# Altium PCB OverCurrent Protection circuit.PcbDoc
Units mm, origin at the board's own origin, x right, y up, seen from the top; angles counter-clockwise.
Board outline 44.45 x 54.48 mm, 2 copper layers (Top Layer, Bottom Layer); 19 components, 15 nets, 61 pads, 12 vias.
Unrouted connection lines stored in the file: 5.
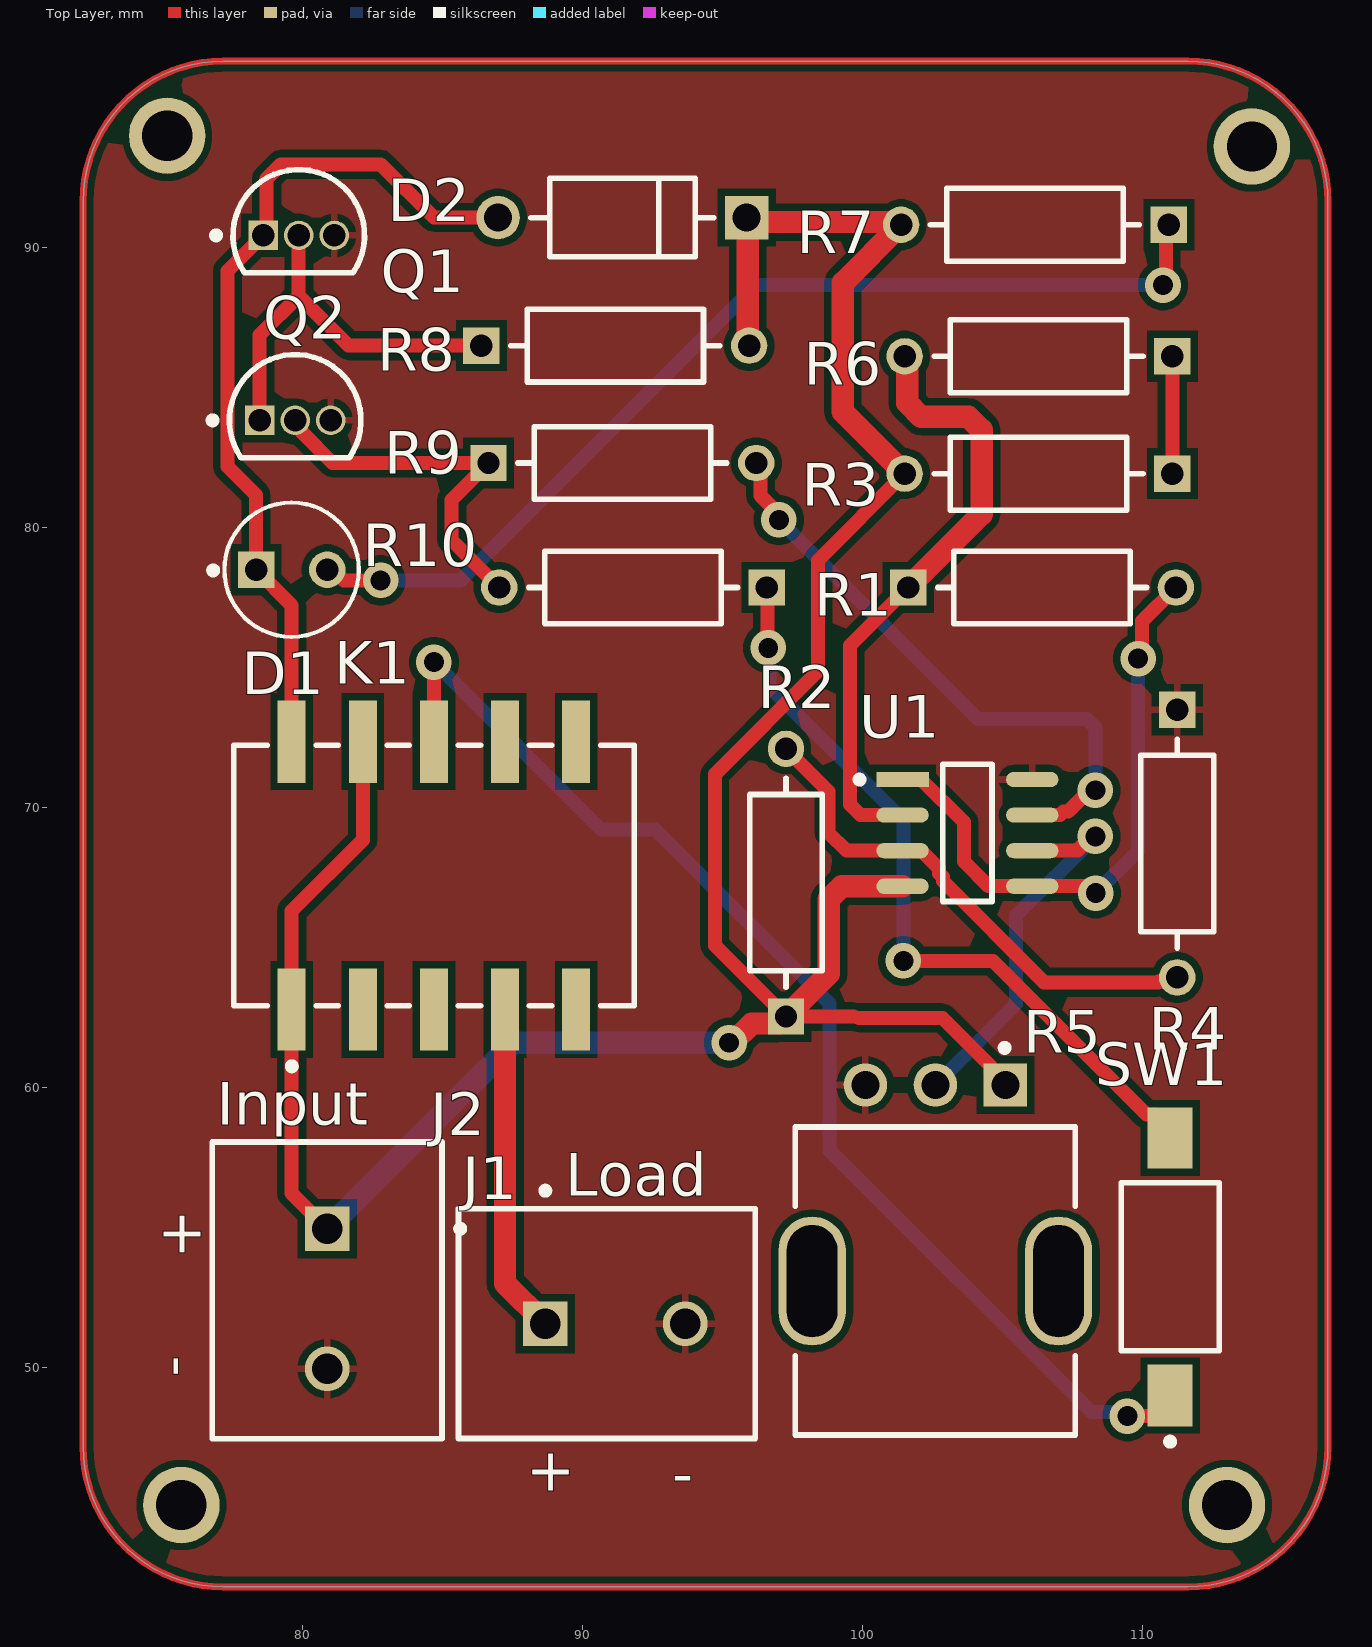
[diagram p0: Top Layer view]
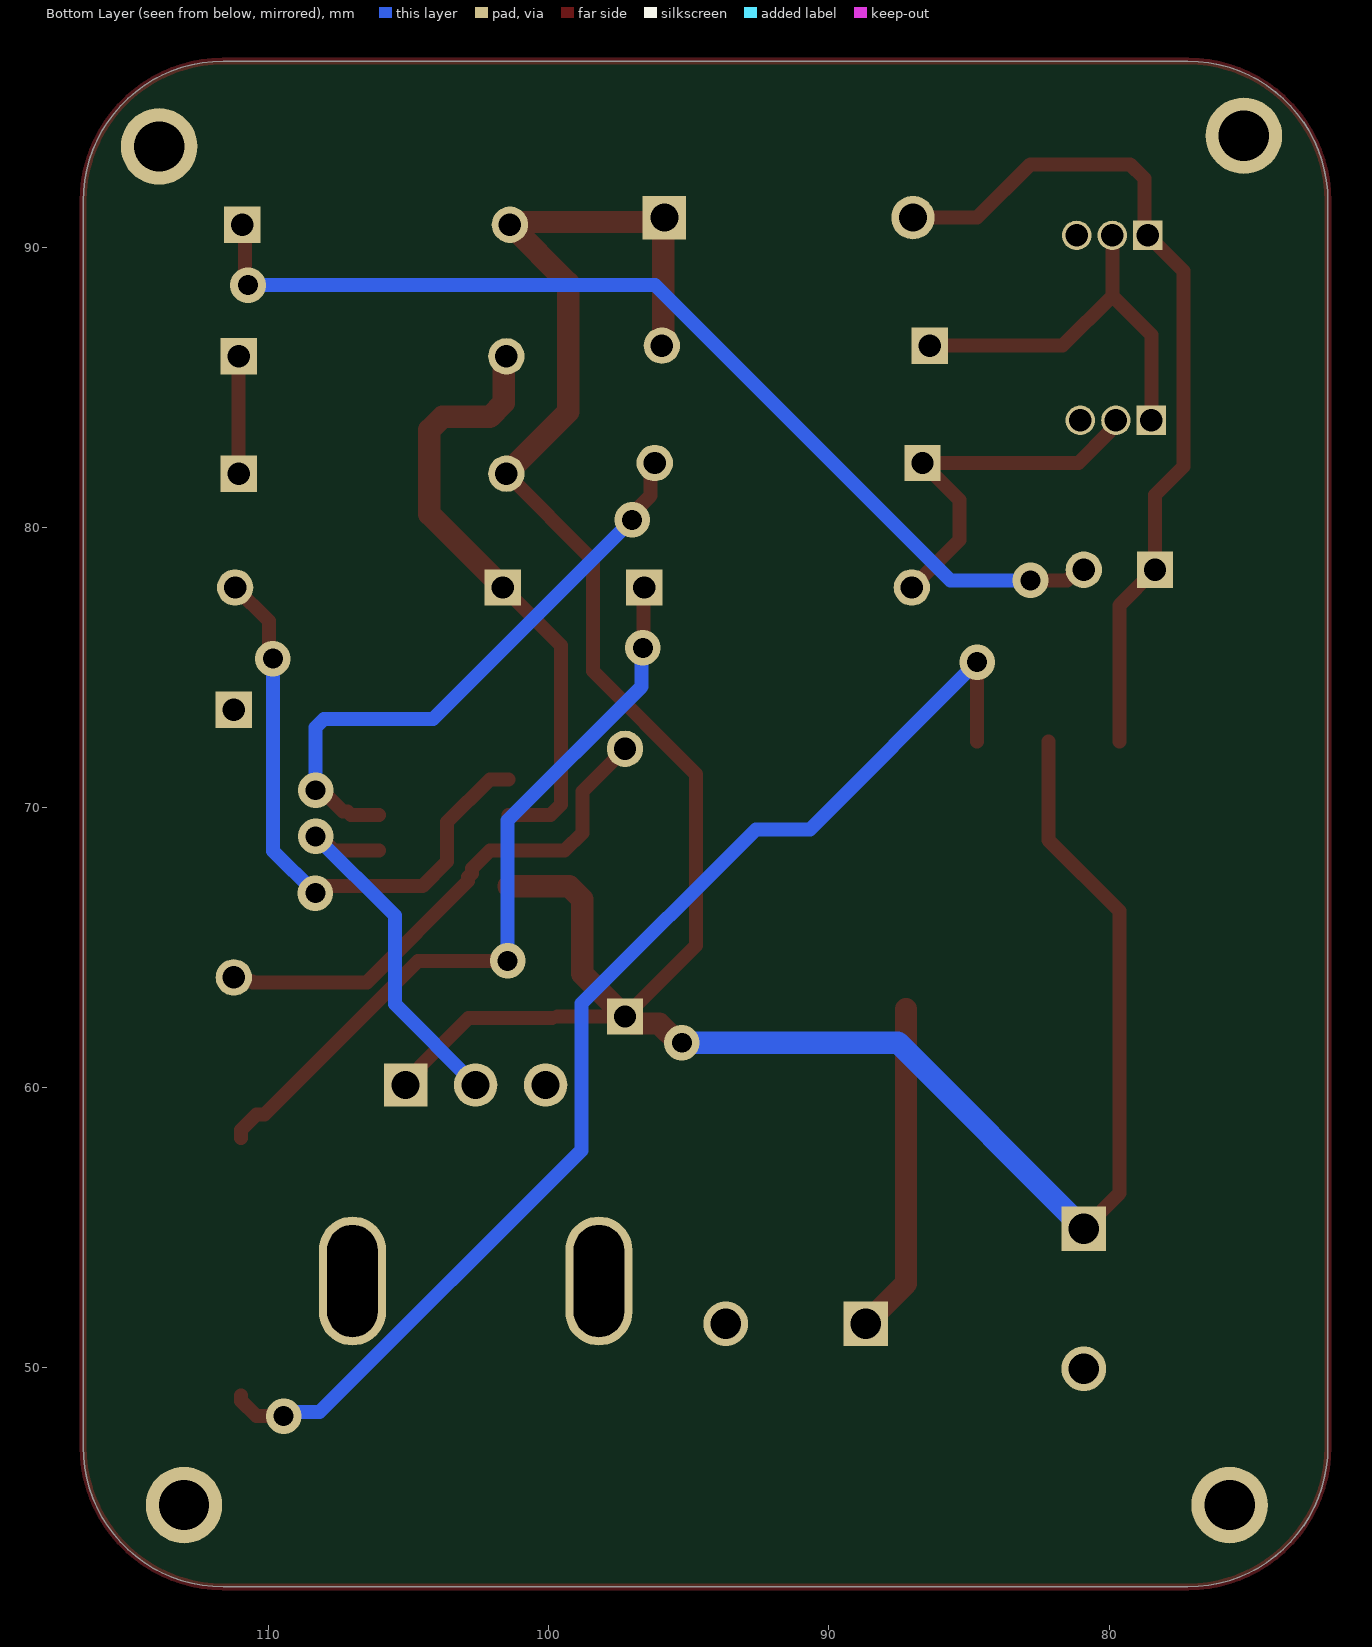
[diagram p1: Bottom Layer view, seen from below]
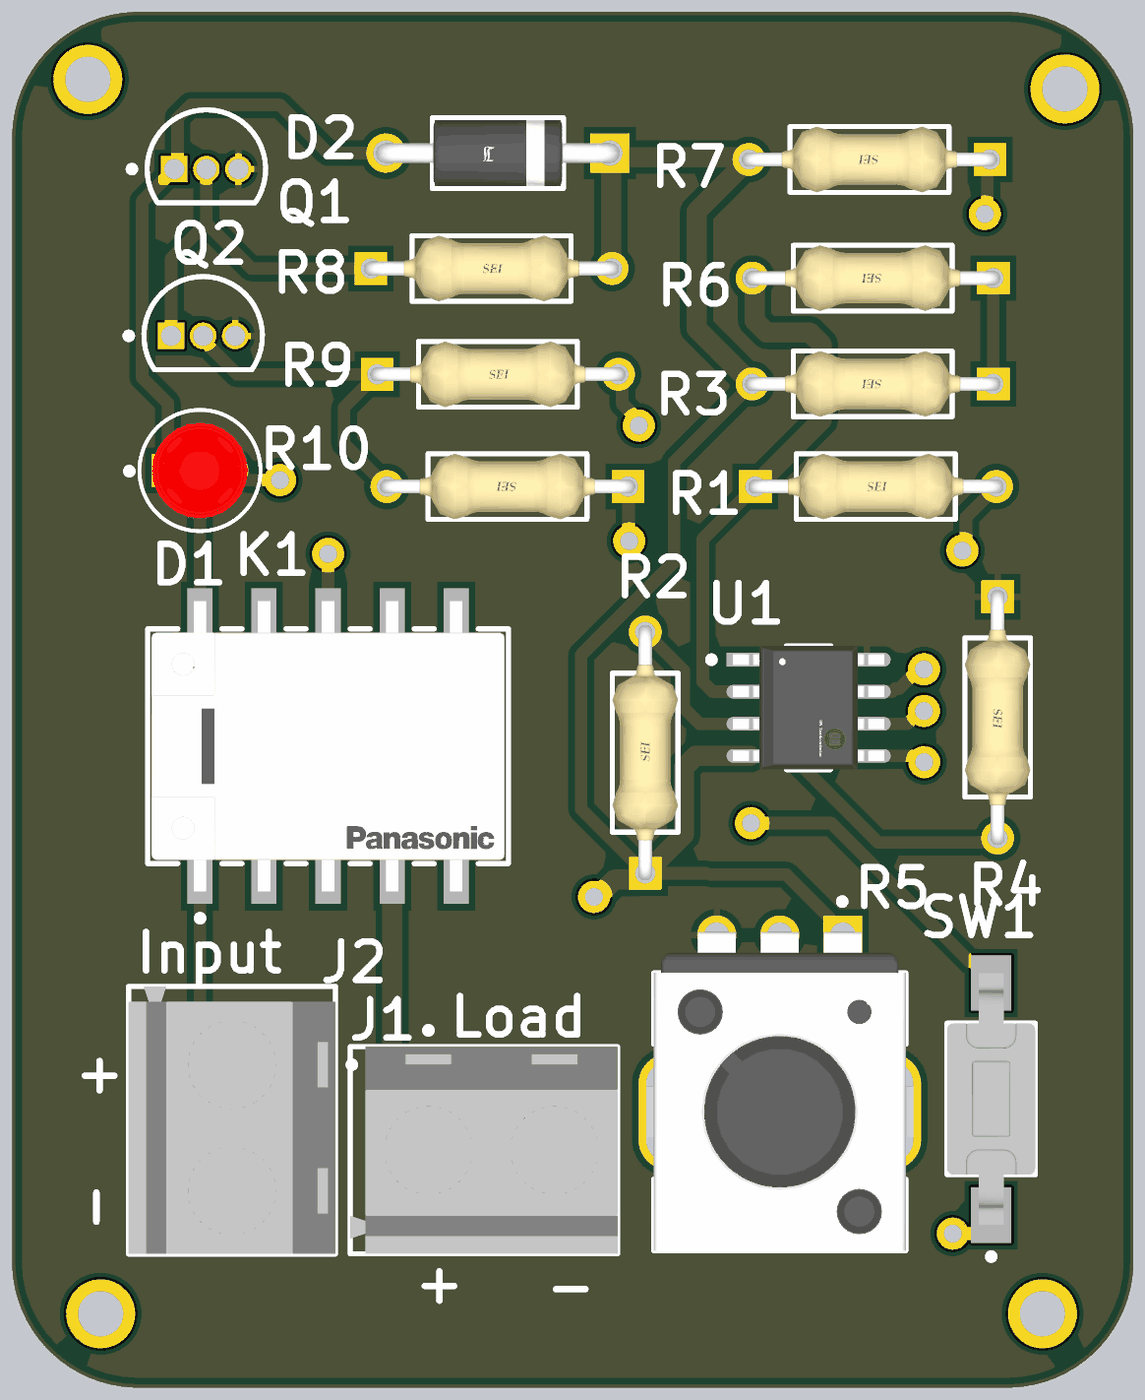
[diagram p2: 3D render of the assembled board from above, using the file's embedded part models]

## Layer stack, top to bottom
Top Solder: solder mask 0.0102, Solder Resist, Dk 3.5
Top Layer: signal copper 0.0356
Dielectric 1: dielectric 0.32, FR-4, Dk 4.8
Bottom Layer: signal copper 0.0356
Bottom Solder: solder mask 0.0102, Solder Resist, Dk 3.5

## Board outline
72.183,47.164 72.183,91.647 cw(c77.183,91.647) 77.183,96.647 111.633,96.647 cw(c111.633,91.647) 116.633,91.647 116.633,47.164 cw(c111.633,47.164) 111.633,42.164 77.183,42.164 cw(c77.183,47.164)

## Design rules (kind name [scope] priority, off if disabled: settings)
Clearance [All] p1: gap=0.254 ignorepadtopadclearanceinfootprint=FALSE
PolygonConnect [All] p1: connectstyle=Relief reliefconductorwidth=0.254 reliefentries=4 polygonreliefangle="90 Angle" airgapwidth=0.254
RoutingVias [All] p1: holewidth=0.711 width=1.27 viastyle="Through Hole" minholewidth=0.711 minwidth=1.27 maxholewidth=0.711 maxwidth=1.27
SolderMaskExpansion [All] p1: expansion=0.102 istentingtop=FALSE
SupplyNets "Schematic Supply Nets_1" [InNet('VCC')] p1: voltage=0.000
SupplyNets "Schematic Supply Nets" [InNet('GND')] p2: voltage=0.000
Width [All] p1: maxlimit=1 minlimit=0.5 preferedwidth=0.8 minimp=50.000000 maximp=50.000000 favimp=50.000000
30 further rules are at their usual default settings.

## Classes and differential pairs
component class "OverCurrent Protection circuit": D1 D2 J1 J2 K1 Q2 R3 R4 R5 R6 SW1 U1

## Components (designator, comment, footprint, x,y, rotation, side; value= is the part's Value field where it differs from the comment)
D1 "LTL-1CHEE" FP-LTL-1CHEE-MFG 79.629,78.486 r0 top
D2 "1N4007" FP-1N4007-MFG 91.44,91.059 r180 top value=15pF
J1 "282836-2" TECO-282836-2_V 91.186,51.562 r0 top
J2 "282836-2" TECO-282836-2_V 80.899,52.451 r270 top
K1 "TQ2SA-4.5V" FP-TQ2SA-4_5V-MFG 84.709,67.564 r0 top
Q1 "BC547B" ONSC-TO-92-3-29-11 79.883,90.424 r0 top
Q2 "BC547B" ONSC-TO-92-3-29-11 79.756,83.82 r0 top
R1 "20k" FP-CF14-MFG 106.426,77.851 r0 top
R2 "1k" FP-CF14-MFG 97.282,67.31 r90 top
R3 "0.9" FP-CF14-MFG 106.299,81.915 r180 top
R4 "1k" FP-CF14-MFG 111.252,68.707 r270 top
R5 "PTV09A-4225F-B103" FP-PTV09A-4-MFG 102.616,53.086 r180 top
R6 "1k" FP-CF14-MFG 106.299,86.106 r180 top
R7 "1k" FP-CF14-MFG 106.172,90.805 r180 top
R8 "1k" FP-CF14-MFG 91.186,86.487 r0 top
R9 "1k" FP-CF14-MFG 91.44,82.296 r0 top
R10 "1k" FP-CF14-MFG 91.821,77.851 r180 top
SW1 "FSMSM" TECO-FSMSM-2_V 110.998,53.594 r90 top
U1 "LM358DR2G" FP-751-07-IPC_C 103.759,69.088 r0 top

## Footprints (in the part's own frame and the unit in brackets; to place one, negate y for a bottom-side part, rotate by r counter-clockwise, add the part's x,y. Pads: shape width x height; smd on the part's side, far side on the other; paste and mask are expansions set on the pad)
FP-1N4007-MFG [mm]
  rect 1.55x1.55 hole 1 paste-2539.97 mask+0: 1(-4.44,0)
  round 1.55 hole 1 paste-2539.97 mask+0: 2(4.44,0)
  silkscreen extent -3.26,-1.4 3.26,1.4, body extent -5.32,-1.5 5.32,1.5, height 0.25
FP-751-07-IPC_C [mm]
  rect 1.874x0.543 smd paste+0 mask+0: 1(-2.316,1.905)
  rrect100% 1.874x0.543 smd paste+0 mask+0: 2(-2.316,0.635) 3(-2.316,-0.635) 4(-2.316,-1.905) 5(2.316,-1.905) 6(2.316,-0.635) 7(2.316,0.635) 8(2.316,1.905)
  silkscreen extent -3.98,-2.45 0.88,2.45, body extent -3.35,-2.55 3.35,2.55, height 0.25
FP-CF14-MFG [mm]
  rect 1.3x1.3 hole 0.8 paste-2539.97 mask+0: 1(-4.78,0)
  round 1.3 hole 0.8 paste-2539.97 mask+0: 2(4.78,0)
  silkscreen extent -3.73,-1.3 3.73,1.3, body extent -5.53,-1.4 5.53,1.4, height 0.25
FP-LTL-1CHEE-MFG [mm]
  rect 1.3x1.3 hole 0.8 paste-2539.97 mask+0: 1(-1.27,0)
  round 1.3 hole 0.8 paste-2539.97 mask+0: 2(1.27,0)
  silkscreen extent -2.92,-2.4 2.4,2.4, body extent -2.15,-2.15 2.15,2.15, height 0.25
FP-PTV09A-4-MFG [mm]
  rect 1.55x1.55 hole 1 paste-2539.97 mask+0: 1(-2.5,-7)
  round 1.55 hole 1 paste-2539.97 mask+0: 2(0,-7) 3(2.5,-7)
  rrect100% 2.4x4.6 hole 4 slot 1.8 at 0 deg paste-2539.97 mask+0: 4(-4.4,0) 5(4.4,0)
  silkscreen extent -5,-8.45 5,5.5, body extent -5.8,-7.88 5.8,5.6, height 0.25
FP-TQ2SA-4_5V-MFG [mm]
  rect 1x2.94 smd paste+0 mask+0: 1(-5.08,-4.78) 2(-2.54,-4.78) 3(0,-4.78) 4(2.54,-4.78) 5(5.08,-4.78) 6(5.08,4.78) 7(2.54,4.78) 8(0,4.78) 9(-2.54,4.78) 10(-5.08,4.78)
  silkscreen extent -7.15,-6.93 7.15,4.65, body extent -7.25,-6.35 7.25,6.35, height 0.25
ONSC-TO-92-3-29-11 [mm] "TO, 3-Leads, Body Dia 4.7mm, Pitch 1.27mm"
  rect 1.05x1.05 hole 0.8: 1(-1.27,0)
  round 1.05 hole 0.8: 2(0,0) 3(1.27,0)
  silkscreen extent -3.07,-1.34 2.35,2.35, body extent -2.35,-1.33 2.36,2.36, height 7.87
TECO-282836-2_V [mm] "Female Header, Pitch 5mm, 1 x 2 Position, Height 10mm"
  rect 1.6x1.6 hole 1.1: 1(-2.5,0)
  round 1.6 hole 1.1: 2(2.5,0)
  silkscreen extent -5.6,-4.1 5,4.87, body extent -5.6,-4.1 5,4.1, height 10
TECO-FSMSM-2_V [mm] "SMD, 2-Leads, Body 6x3.5mm, Pitch 9.19mm"
  rect 2.2x1.6 smd: 1(-4.595,0)
  rect 2.18x1.6 smd: 2(4.595,0)
  silkscreen extent -6.37,-1.75 3,1.75, body extent -4.98,-1.75 4.98,1.75, height 4.4

## Part data
D1: library part CMP-22017-000040-1, "LED RED CLEAR T/H", Case/Package=T, Color=Red, Forward Current=30mA, Forward Voltage=2V, Max Operating Temperature=100°C, Max Power Dissipation=100mW, Min Operating Temperature=-55°C, Package Quantity=1000, Reverse Voltage=5V, Test Current=10mA, Depth=3.8mm, Diameter=3.1mm, Dominant Wavelength=625nm, Height=5.2mm, Illumination Color=Red, Lead Free="Lead Free", Length=3.8mm, Lens Color=Red, Lens Style=Dome, Lens Transparency=Clear, Luminous Intensity=19mcd, Mount="Through Hole", Number of Elements=1, Number of LEDs=1, Number of Pins=2, Packaging=Bulk, Power Dissipation=100mW, Radiation Hardening=No, RoHS Compliant=Yes, Series=-, Viewing Angle=45°, Wavelength=635nm, Width=3.8mm
D2: library part CMP-123542-000001-1, "Rectifier diode 1000 V 1 A DO-41, ,", Capacitance=15pF, Forward Current=1A, Manufacturer=Diotec, Max Junction Temp=+175°C, Max Repetitive Reverse Voltage=1000V, Max Surge Forward Current=27A, Peak Reverse Current=5uA, Temperature="-50°C to +175°C", Temperature Range Low=-50°C, Automotive=No, Category=Diode, ComponentLink2Description=Datasheet, ComponentLink2URL=https://datasheet.octopart.com/1N4007-Diotec-datasheet-62346875.pdf, Device Class L1="Discrete Semiconductors", Device Class L2=Diodes, Device Class L3="Rectifier Diodes", Height=2.8mm, Ipc Land Pattern Name=DIOAD888W100L520D280, Lead Free=Yes, Manufacturer Part Number=1N4007, Octopart=https://octopart.com/1n4007-diotec-4040411, Package=1N4007, Reverse Voltage=1000V, RoHS=TRUE, Temperature Range High=+175°C
J1 J2: library part CMP-1684-00017-1, "Female Header, Pitch 5 mm, 1 x 2 Position, Height 10 mm, Tail Length 3.5 mm, Rohs, Bulk", Color=Green, Current=13.5A, Manufacturer="TE Connectivity", Package Description="Female Header, Pitch 5 mm, 1 x 2 Position, Height 10 mm, Tail Length 3.5 mm", Package Reference=THD, Standard Package=300, Voltage=300V, 3D Model=282836-2.pdf, Category=Connectors,Interconnects, Clamp Material - Plating=Brass-NickelPlated, Contact Material - Plating=Brass-TinPlated, Datasheet URL=http://www.te.com.cn/commerce/DocumentDelivery/DDEController?Action=showdoc&DocId=Catalog+Section%7F1308389_EUROSTYLE_TERMINAL_BLOCKS%7F0607%7Fpdf%7FEnglish%7FENG_CS_1308389_EUROSTYLE_TERMINAL_BLOCKS_0607.pdf%7F282836-2, Dynamic Catalog=BuchananSeries, Family=TerminalBlocks-WiretoBoard, Featured Product=EurostyleTerminalBlockConnectors, Features=Interlocking(Side), Housing Material=Polyamide(PA66),Nylon6/6, Manufacturer URL=http://www.te.com, Mating Orientation=HorizontalwithBoard, Mounting Type=ThroughHole, Number of Levels=1, Other Names="5ULV-02B / A98076", Packaging=Bulk, Pitch="0.197\"(5.00mm)", Positions Per Level=2, Product Training Modules=Wire-to-BoardEurostyleTerminalBlocks, RoHS Information=282836-2StatementofCompliance, Screw Material - Plating=Brass-NickelPlated, Screw Thread=M3, Series=Buchanan, Torque - Screw=0.68Nm(6Lb-In), Wire Gauge=16-30AWG, Wire Termination=Screw-RisingCageClamp
K1: library part CMP-00287-00697730-1, "TQ2SA-4.5V Electromechanical Relay DPDT 2A 4.5VDC 145Ohm Surface Mount", Ambient Temperature Range High=85°C, Coil Current=31mA, Coil Power=140mW, Coil Resistance=145Ω, Coil Voltage (DC)=4.5V, Contact Current Rating=2A, Max Voltage Rating (AC)=125V, Max Voltage Rating (DC)=220V, Min Operating Temperature=-40°C, Coil Type=Non-Latching, Contact Material="Gold, Silver", Current Rating=2A, Depth=11.5mm, Height=5.9mm, Insertion Loss (dB)=0.8dB, Lead Free="Lead Free", Length=14mm, Max Current Rating=2A, Max Operating Temperature=85°C, Mount="Surface Mount", NexarPartId=697730, Number Of Contacts=2, Number of Pins=8, Operate Time=4ms, Power Consumption=140mW, Radiation Hardening=No, Relay Type=Telecom, Release Time=4ms, RoHS=Compliant, Switching Current=2A, Termination="Gull Wing", Throw Configuration=DPDT, Voltage Rating (AC)=125V, Voltage Rating (DC)=220V, Weight=2g
Q1 Q2: library part CMP-1048-01467-1, "Amplifier Transistor, NPN Silicon, 3-Pin TO-92, Bulk Box", Manufacturer="On Semiconductor", ComponentLink1Description="Manufacturer URL", ComponentLink1URL=http://www.onsemi.com/, ComponentLink2Description=Datasheet, ComponentLink2URL=http://www.onsemi.com/pub_link/Collateral/BC546-D.PDF, ComponentLink3Description="Package Specification", ComponentLink3URL=http://www.onsemi.cn/pub_link/Collateral/2N6426-D.PDF, DatasheetVersion="Rev. 7", fT Min (MHz)=150, IC Continuous (A)=0.1, Mounting Technology="Through Hole", PackageDescription="3-Pin Transistor Outline, Body 4.825 x 3.685 mm, Pitch 1.27 mm", PackageReference=TO-92-3-29-11_AM_SL, PackageVersion="Rev. AM", Packing="Bulk Box", PartNumber=BC547B, Polarity=NPN, RoHS=FALSE
R1 R2 R3 R4 R6 R7 R8 R9 R10: library part CMP-26528-000003-1, "RES 7.5K OHM 1/4W 5% AXIAL", Case/Package=Axial, Max Operating Temperature=155°C, Max Power Dissipation=250mW, Min Operating Temperature=-55°C, Resistance=7.5kR, Resistor Type="Carbon Film", Temperature Coefficient=-400ppm/°C, Tolerance=5%, Contact Plating=Tin, Diameter=2.3mm, Features="Flame Retardant Coating", Lead Free="Lead Free", Length=0.256inch, Mount="Through Hole", Number of Terminations=2, Packaging="Tape and Reel", Power Rating=250mW, Radiation Hardening=No, RoHS Compliant=Yes, Series=CF
R5: library part CMP-07234-000052-1, "POT 10K OHM 1/20W CARBON LINEAR", Max Operating Temperature=50°C, Max Power Dissipation=50mW, Min Operating Temperature=-10°C, Package Quantity=100, Resistance=10kR, Resistance Tolerance=20%, Resistor Type=Carbon, Actuator Diameter=0.236inch, Actuator Length=0.984inch, Depth=12.5mm, Height=12.5mm, Hole Diameter=9.1mm, Length=11.4mm, Military Standard=Not, Mount="Through Hole", Number of Gangs=1, Number of Turns=1, Packaging=Bulk, Power Rating=50mW, Radiation Hardening=No, REACH SVHC="No SVHC", RoHS Compliant=Yes, Series="Pro Audio PTV09", Taper=Linear, Technology="CARBON FILM", Termination=PCB, Tolerance=20%, Type=Potentiometer
SW1: library part CMP-2000-07511-1, "FSMSM Push Button Switch, 50 mA, -35 to 85 degC, 2-Pin SMD, RoHS, Bulk", Case\/Package=SMD/SMT, Contact Current Rating=50mA, Contact Resistance=100mOhm, Manufacturer="TE Connectivity", Max Operating Temperature=85degC, Max Voltage Rating (DC)=12V, Min Operating Temperature=-35degC, Operating Force=180gf, Package Description="2-Pin Surface Mount Device, Body 6 x 3.5 mm, Pitch 9.19 mm", Package Quantity=1000, Voltage Rating (DC)=24V, Actuator Length=1.07mm, Actuator Material=Polyamide, Contact Material=Brass, Contact Plating=Silver, Current Rating=50mA, Datasheet URL=http://www.te.com/commerce/DocumentDelivery/DDEController?Action=showdoc&DocId=Customer+Drawing%7F1437566-3%7FC2%7Fpdf%7FEnglish%7FENG_CD_1437566-3_C2_1437566_3_1_c.dwg.pdf%7F1437566-3, Datasheet Version="Rev. C2, 08/2014", Electrical Life=20000Cycles, ELV=Compliant, Illumination Type=Illuminated, Lead Free=LeadFree, Manufacturer URL=http://www.te.com/, Mechanical Life=20000Cycles, Mount=SurfaceMount, Mounting Technology=SurfaceMount, Orientation=Straight, Package Reference=FSMSM, Packaging=LoosePiece, REACH SVHC=Unknown, RoHSCompliant=true, Switch Travel=0.25mm, Termination=GullWing, Throw Configuration=SPST
U1: library part CMP-1310-00291-2, "IC OPAMP GP 2 CIRCUIT 8SOIC", Case/Package=SOIC, Dual Supply Voltage=9V, Input Bias Current=250nA, Input Offset Voltage (Vos)=7mV, Max Dual Supply Voltage=16V, Max Operating Temperature=70°C, Max Supply Voltage=32V, Min Dual Supply Voltage=1.5V, Min Operating Temperature=0°C, Min Supply Voltage=3V, Nominal Supply Current=1.2mA, Operating Supply Current=1.5mA, Output Current=40mA, Package Quantity=2500, Power Supply Rejection Ratio (PSRR)=65dB, Voltage Gain=100dB, Bandwidth=1MHz, Common Mode Rejection Ratio=65dB, Contact Plating=Tin, Gain Bandwidth Product=1MHz, Halogen Free="Halogen Free", Height=1.5mm, Lead Free="Lead Free", Length=5mm, Number of Amplifiers=2, Number of Channels=2, Number of Circuits=2, Number of Elements=2, Number of Pins=8, Operating Supply Voltage=16V, Output Current per Channel=40mA, Packaging="Tape and Reel", Radiation Hardening=No, REACH SVHC="No SVHC", Slew Rate=0.6V/µs, Width=4mm

## Free pads (board coordinates)
  round 2.73 hole 1.796: 2(113.919,93.599) 3(75.184,93.98) 4(75.692,45.085) 5(113.03,45.085)

## Via types
v1: diameter 1.27, hole 0.711, Top Layer to Bottom Layer, 12 vias

## Nets (pads, with @x,y where several pads share a name; then routed paths per layer and width w, separated by ;. In a path a pad name is that pad's centre, name@x,y a point inside that pad or via, vN(x,y) a via of type N, cw(c..) or ccw(c..) an arc to the next point about the centre after c; other vN are vias at no path point)
GND: J1.2 J2.2 Q1.3 Q2.3 R4.1 R5.3 U1.8
NetD1_1: D1.1 D2.2 K1.10 Q1.1 | length 30.9
  Top Layer w0.5: K1.10 79.629,77.216 D1.1 78.359,81.153 77.343,82.169 77.343,89.154 Q1.1 78.74,90.551 78.74,92.456 79.248,92.964 82.804,92.964 84.709,91.059 D2.2
NetD1_2: D1.2 R7.1 | length 36.6
  Top Layer w0.5: D1.2 81.115,78.486 81.496,78.105 v1(82.804,78.105) ; v1(110.744,88.646) 110.848,88.75 110.848,90.701 R7.1
  Bottom Layer w0.5: v1(82.804,78.105) 85.663,78.105 96.204,88.646 v1(110.744,88.646)
NetJ1_1: J1.1 K1.4 | length 11.8
  Top Layer w0.8: K1.4 87.249,52.999 J1.1
NetK1_8: K1.8 SW1.1 | length 43.8
  Top Layer w0.5: K1.8 v1(84.709,75.184) ; v1(109.474,48.26) 110.448,48.26 110.998,48.81 SW1.1
  Bottom Layer w0.5: v1(84.709,75.184) 90.68,69.213 92.612,69.213 98.837,62.988 98.837,57.755 108.185,48.407 109.327,48.407 v1(109.474,48.26)
NetQ1_2: Q1.2 Q2.1 R8.1 | length 14.4
  Top Layer w0.5: Q2.1 78.486,86.868 79.883,88.265 ; Q1.2 79.883,88.265 ; R8.1 81.661,86.487 79.883,88.265
NetQ2_2: Q2.2 R9.1 R10.2 | length 13.3
  Top Layer w0.5: Q2.2 79.756,83.671 79.997,83.43 79.997,83.394 81.095,82.296 R9.1 85.344,80.98 85.344,79.548 R10.2
NetR1_1: R1.1 R6.2 U1.2 | length 22.1
  Top Layer w0.5: U1.2 101.435,69.731 99.941,69.731 99.568,70.104 99.568,75.773 R1.1
  Top Layer w0.8: R6.2 101.615,86.01 101.615,84.44 102.108,83.947 103.798,83.947 104.267,83.478 104.267,80.472 R1.1
NetR1_2: R1.2 U1.1 U1.5 | length 21.5
  Top Layer w0.5: U1.1 102.108,70.993 103.632,69.469 103.632,68.072 104.521,67.183 U1.5 107.886,67.183 108.134,66.935 v1(108.342,66.935) ; v1(109.855,75.311) 110.002,75.458 110.002,76.647 R1.2
  Bottom Layer w0.5: v1(108.342,66.935) 109.855,68.448 v1(109.855,75.311)
NetR2_2: R2.2 R4.2 U1.3 | length 18.5
  Top Layer w0.5: R2.2 98.806,70.566 98.806,69.088 99.441,68.453 102.108,68.453 102.751,67.81 102.751,67.637 102.884,67.504 102.884,67.369 106.499,63.754 110.559,63.754 110.579,63.774 111.099,63.774 R4.2
NetR3_1: R3.1 R6.1 | length 4.2
  Top Layer w0.5: R3.1 R6.1
NetR5_2: R5.2 U1.6 | length 13.7
  Top Layer w0.5: U1.6 107.682,68.453 108.19,68.961 v1(108.331,68.961)
  Bottom Layer w0.5: R5.2 105.5,62.97 105.5,66.13 v1(108.331,68.961)
NetR9_2: R9.2 U1.7 | length 21.7
  Top Layer w0.5: R9.2 96.373,82.143 96.373,81.127 97.028,80.472 v1(97.028,80.264) ; U1.7 106.083,69.731 107.069,69.731 107.188,69.85 107.361,69.85 108.123,70.612 v1(108.331,70.612)
  Bottom Layer w0.5: v1(97.028,80.264) 104.14,73.152 108.038,73.152 108.331,72.859 v1(108.331,70.612) v1@108.331,70.485
NetR10_1: R10.1 SW1.2 | length 27.7
  Top Layer w0.5: R10.1 96.624,77.828 96.624,75.715 v1(96.647,75.692) ; v1(101.473,64.516) 104.671,64.516 110.158,59.029 110.448,59.029 110.998,58.479 SW1.2
  Bottom Layer w0.5: v1(96.647,75.692) 96.697,75.642 96.697,74.307 101.473,69.531 v1(101.473,64.516)
VCC: D2.1 J2.1 K1.1 K1.9 R2.1 R3.2 R5.1 R7.2 R8.2 U1.4 | length 98.9
  Top Layer w0.5: J2.1 79.629,56.221 K1.1 79.629,66.294 82.169,68.834 K1.9 ; 99.689,62.53 R2.1 94.742,65.07 94.742,71.182 98.425,74.865 98.425,78.821 R3.2 ; 99.887,62.484 102.87,62.484 104.591,60.763 104.591,60.611 R5.1
  Top Layer w0.8: v1(95.25,61.595) 95.377,61.595 96.062,62.28 97.032,62.28 R2.1 98.806,64.054 98.806,66.714 99.275,67.183 U1.4 ; D2.1 D2.1@95.923,91.016 ; R8.2 95.923,86.53 D2.1@95.923,91.016 ; R3.2 99.314,84.12 99.314,88.727 R7.2 101.296,90.901 96.038,90.901 D2.1@95.923,91.016
  Bottom Layer w0.8: J2.1 87.543,61.595 v1(95.25,61.595)
pads on no net: K1.2 K1.3 K1.5 K1.6 K1.7 R5.4 R5.5
copper on no net: | length 189.3
  Top Layer w0.254: 72.183,47.164 ccw(c77.183,47.164) 77.183,42.164 111.633,42.164 ccw(c111.633,47.164) 116.633,47.164 116.633,91.647 ccw(c111.633,91.647) 111.633,96.647 77.183,96.647 ccw(c77.183,91.647) 72.183,91.647 72.183,47.164

## Polygon pours and split planes (outlines as drawn)
GND on Top Layer "GND POLYGON POUR" (solid, pour order 0): 72.183,47.164 72.183,91.647 cw(c77.183,91.647) 77.183,96.647 111.633,96.647 cw(c111.633,91.647) 116.633,91.647 116.633,47.164 cw(c111.633,47.164) 111.633,42.164 77.183,42.164 cw(c77.183,47.164)

## Silkscreen, mask and mechanical layers (free items; w line width, h text height)
Top Overlay:
  text "Input" at 76.962,58.674 h1.52
  text "Load" at 89.408,56.134 h1.52
  text "+" at 75.057,55.626 h1.52 r270
  text "-" at 74.93,50.419 h1.52 r270
  text "+" at 88.011,45.593 h1.52
  text "-" at 93.218,45.466 h1.52